# Altium PCB Печатная плата преобразователя.PcbDoc
Units mm, origin at the board's own origin, x right, y up, seen from the top; angles counter-clockwise.
Board outline 25.02 x 20 mm, 2 copper layers (Top Layer, Bottom Layer); 18 components, 12 nets, 40 pads, 4 vias.
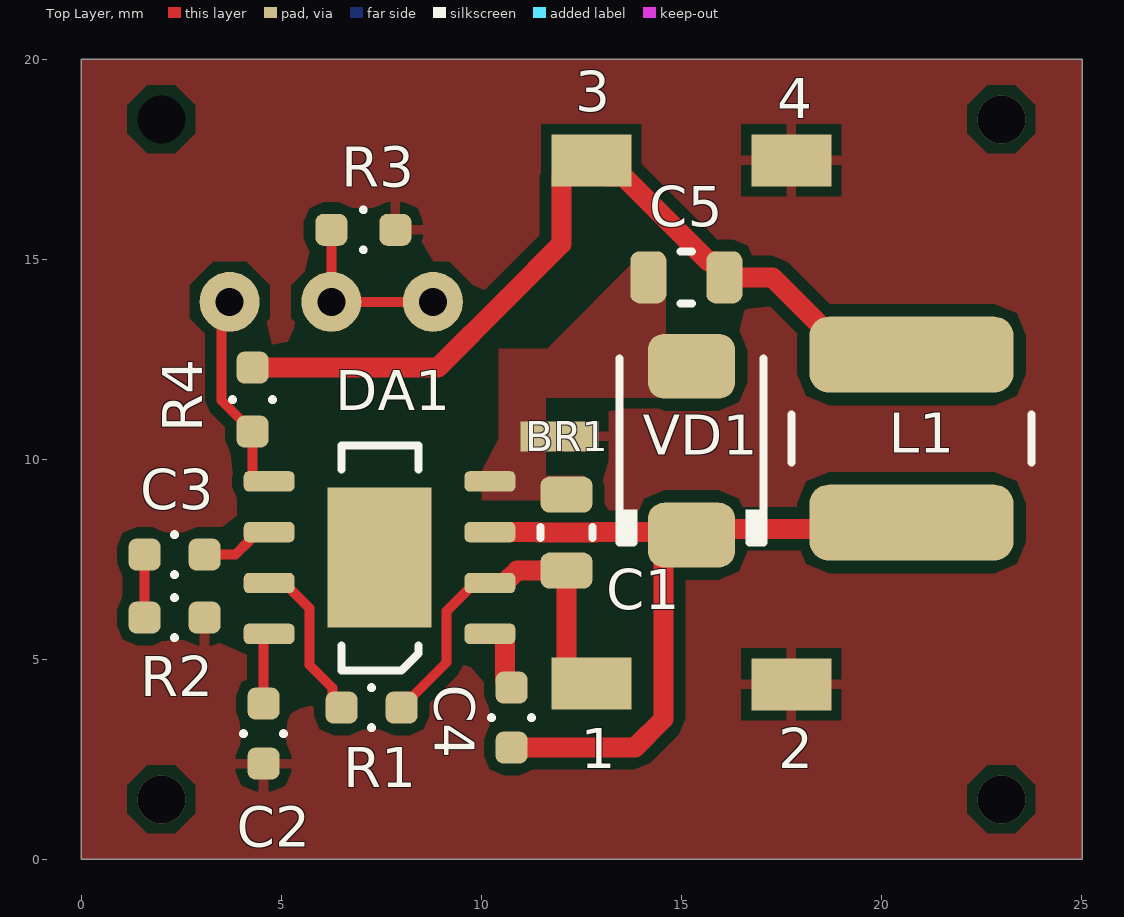
[diagram p0: Top Layer view]
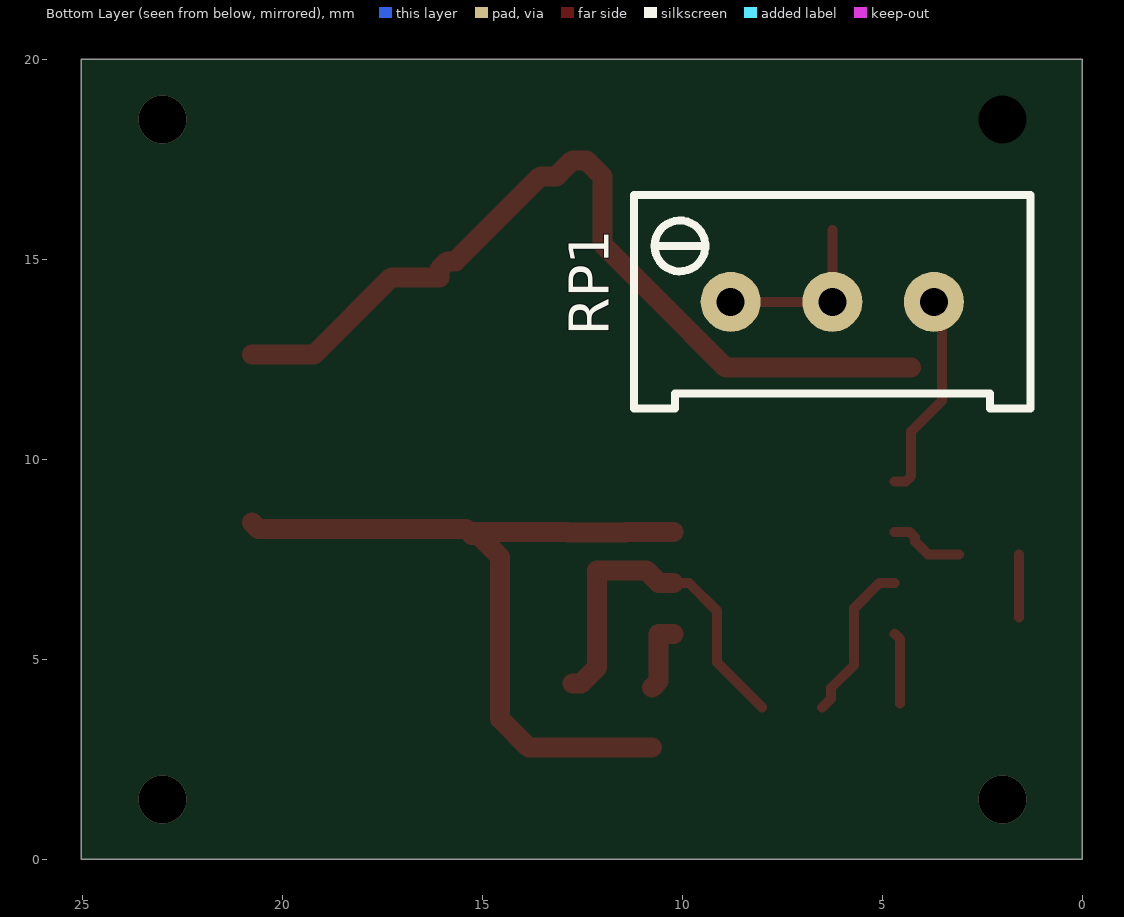
[diagram p1: Bottom Layer view, seen from below]

## Layer stack, top to bottom
Top Solder: solder mask 0.0102, Solder Resist, Dk 3.5
Top Layer: signal copper 0.0356
Dielectric 1: dielectric 0.32, FR-4, Dk 4.8
Bottom Layer: signal copper 0.0356
Bottom Solder: solder mask 0.0102, Solder Resist, Dk 3.5

## Board outline
0,0 25.025,0 25.025,20 0,20

## Design rules (kind name [scope] priority, off if disabled: settings)
Clearance [All] p1: gap=0.25 ignorepadtopadclearanceinfootprint=FALSE
PolygonConnect PolygonConnect_7 [All vs IsNamedPolygon('PGND_L01_P005')] p1: connectstyle=Direct reliefconductorwidth=0.254 reliefentries=4 polygonreliefangle="90 Angle" airgapwidth=0.254
PolygonConnect PolygonConnect_6 [All vs IsNamedPolygon('PGND_L01_P004')] p2: connectstyle=Direct reliefconductorwidth=0.254 reliefentries=4 polygonreliefangle="90 Angle" airgapwidth=0.254
PolygonConnect PolygonConnect_5 [All vs IsNamedPolygon('PGND_L01_P003')] p3: connectstyle=Direct reliefconductorwidth=0.254 reliefentries=4 polygonreliefangle="90 Angle" airgapwidth=0.254
PolygonConnect PolygonConnect_4 [All vs IsNamedPolygon('tga')] p4: connectstyle=Direct reliefconductorwidth=0.254 reliefentries=4 polygonreliefangle="90 Angle" airgapwidth=0.254
PolygonConnect PolygonConnect_3 [All vs IsNamedPolygon('tga')] p5: thpad.connectstyle=Direct thpad.reliefconductorwidth=0.254 thpad.reliefentries=4 thpad.polygonreliefangle="90 Angle" thpad.airgapwidth=0.254 smdpad.connectstyle=Direct smdpad.reliefconductorwidth=0.254 smdpad.reliefentries=4 smdpad.polygonreliefangle="90 Angle" smdpad.airgapwidth=0.254 via.connectstyle=Relief via.reliefconductorwidth=0.254 via.reliefentries=4 via.polygonreliefangle="90 Angle" via.airgapwidth=0.254
PolygonConnect PolygonConnect_2 [All vs IsNamedPolygon('tga')] p6: thpad.connectstyle=Direct thpad.reliefconductorwidth=0.254 thpad.reliefentries=4 thpad.polygonreliefangle="90 Angle" thpad.airgapwidth=0.254 smdpad.connectstyle=Relief smdpad.reliefconductorwidth=0.254 smdpad.reliefentries=4 smdpad.polygonreliefangle="90 Angle" smdpad.airgapwidth=0.254 via.connectstyle=Relief via.reliefconductorwidth=0.254 via.reliefentries=4 via.polygonreliefangle="90 Angle" via.airgapwidth=0.254
PolygonConnect PolygonConnect_1 [All vs IsNamedPolygon('NONET_L01_P001')] p7: thpad.connectstyle=Direct thpad.reliefconductorwidth=0.254 thpad.reliefentries=4 thpad.polygonreliefangle="90 Angle" thpad.airgapwidth=0.254 smdpad.connectstyle=Direct smdpad.reliefconductorwidth=0.254 smdpad.reliefentries=4 smdpad.polygonreliefangle="90 Angle" smdpad.airgapwidth=0.254 via.connectstyle=Relief via.reliefconductorwidth=0.254 via.reliefentries=4 via.polygonreliefangle="90 Angle" via.airgapwidth=0.254
PolygonConnect [All] p8: connectstyle=Relief reliefconductorwidth=0.254 reliefentries=4 polygonreliefangle="90 Angle" airgapwidth=0.254
RoutingVias [All] p1: holewidth=1 width=1 viastyle="Through Hole" minholewidth=0.5 minwidth=1 maxholewidth=2 maxwidth=3
SolderMaskExpansion [All] p1: expansion=0.102 istentingtop=FALSE
Width [All] p1: maxlimit=0.5 minlimit=0.25 preferedwidth=0.25
30 further rules are at their usual default settings.

## Classes and differential pairs
component class "Схема преобразователя": 1 2 3 4 BR1 C1 C2 C3 C4 C5 L1 R1 R2 R3 R4 RP1 VD1

## Components (designator, comment, footprint, x,y, rotation, side; value= is the part's Value field where it differs from the comment)
1 "Контактная площадка" Cont_point#1 12.75,4.4 r90 top
2 "Контактная площадка" Cont_point#2 17.75,4.375 r90 top
3 "Контактная площадка" Cont_point#3 11.855,17.475 r90 top
4 "Контактная площадка" Cont_point#4 17.05,17.475 r90 top
BR1 "Соединение цепей" BREAK_GND 13.425,10.575 r180 top net-tie
C1 "CC0805MKX5R5BB476 (Yageo) SMD 0805-22мкФ±20% 25В X5R. -55°C ~ 85°C" C0805 12.13,8.168 r90 top value=22мк
C2 "CGA3E2X7R1H104K080AA (TDK Corporation) SMD 0603-0,1мкФ±10% 50В X7R. -55°C ~ 125°C" C0603 4.555,3.143 r270 top value=0,1мк
C3 "GCM188R71C105MA64 (Murata) SMD 0603-1мкФ±20% 16В X7R. -55°C ~ 125°C" C0603 2.33,7.618 r180 top value=330п
C4 "GRM188R71H103KA01 (Murata) SMD 0603-0,01мкФ±10% 50В X7R. -55°C ~ 125°C" C0603 10.755,3.543 r270 top value=0,01мк
C5 "CC0805MKX5R5BB476 (Yageo) SMD 0805-22мкФ±20% 25В X5R. -55°C ~ 85°C" C0805 15.125,14.55 r180 top value=22мк
DA1 "Микросхема MP2307DN-LF-Z" SO8_PowerPad 7.455,7.543 r180 top
L1 "Дроссель VLS6045EX-220M 22мкГн±20% 1,9А" VLS6045 20.755,10.518 r0 top value=22мкГн
R1 "0603-100 кОм±5% SMD -60°C ~ 155°C" R0603#1 7.255,3.793 r180 top value=100к
R2 "0603-6,81 кОм±1% SMD -60°C ~ 155°C" R0603#1 2.33,6.043 r0 top value=6,81к
R3 "0603-1,2 кОм±5% SMD -60°C ~ 155°C" R0603#2 7.05,15.738 r0 top value=1,3к
R4 "0603-24 кОм±5% SMD -60°C ~ 155°C" R0603#2 4.28,11.493 r90 top value=24к
RP1 "Резистор 3296W-1-202LF" 3296W 6.25,13.938 r0 bottom value=10к
VD1 "Диод Шоттки SK56" DO214Aa 15.255,10.218 r270 top

## Footprints (in the part's own frame and the unit in brackets; to place one, negate y for a bottom-side part, rotate by r counter-clockwise, add the part's x,y. Pads: shape width x height; smd on the part's side, far side on the other; paste and mask are expansions set on the pad)
3296W [mm] "Подстроечный многооборотный резистор Bourns 3296W"
  round 1.5 hole 0.7: 1(2.54,0) 2(0,0) 3(-2.54,0)
  silkscreen extent -4.95,-2.67 4.95,2.67, body extent -4.76,-2.42 4.76,2.41, height 11.56
BREAK_GND [mm] "Разделение типов земли или питания"
  rect 1x0.75 smd paste-1 mask-1: 1(1,0) 2(1.95,0)
C0603 [mm] "Размер 1.6 x 0.8 мм; точность установки ±0.25 мм"
  rrect50% 0.8x0.8 smd: 1(-0.75,0) 2(0.75,0)
  silkscreen extent -0.01,-0.51 0.01,0.51, body extent -0.8,-0.4 0.8,0.4, height 0.95
C0805 [mm] "Размер 2.0 x 1.3 мм; точность установки ±0.25 мм"
  rrect50% 0.9x1.3 smd: 1(-0.95,0) 2(0.95,0)
  silkscreen extent -0.14,-0.65 0.14,0.65, body extent -1,-0.65 1,0.65, height 1.45
Cont_point#1 [mm] "Контактная площадка на плате"
  rect 1.3x2 smd mask+0.102: 1(0,0)
Cont_point#2 [mm] "Контактная площадка на плате"
  rect 1.3x2 smd paste-1: 1(0,0)
Cont_point#3 [mm] "Контактная площадка на плате"
  rect 1.3x2 smd paste-1: 1(0,-0.895)
Cont_point#4 [mm] "Контактная площадка на плате"
  rect 1.3x2 smd mask+0.102: 1(0,-0.7)
DO214Aa [mm] "5.6x3.95 (SMB)"
  rrect50% 1.62x2.18 smd: 1(-2.11,0) 2(2.11,0)
  silkscreen extent -2.3,-1.8 2.3,1.8, body extent -2.73,-1.8 2.67,1.8, height 2.3
R0603#1 [mm] "Размер 1.6 x 0.8 мм; точность установки ±0.25 мм"
  rrect50% 0.8x0.8 smd: 1(-0.75,0) 2(0.75,0)
  silkscreen extent -0.01,-0.51 0.01,0.51, body extent -0.8,-0.4 0.8,0.4, height 0.5
R0603#2 [mm] "Размер 1.6 x 0.8 мм; точность установки ±0.25 мм"
  rrect50% 0.8x0.8 smd: 1(-0.8,0) 2(0.8,0)
  silkscreen extent -0.01,-0.51 0.01,0.51, body extent -0.8,-0.4 0.8,0.4, height 0.5
SO8_PowerPad [mm] "Корпус SOIC-8 с добавочным выводом под корпусом (PowerPad)"
  rrect50% 1.27x0.51 smd: 1(-2.76,1.905) 2(-2.76,0.635) 3(-2.76,-0.635) 4(-2.76,-1.905) 5(2.76,-1.905) 6(2.76,-0.635) 7(2.76,0.635) 8(2.76,1.905)
  rect 2.6x3.5 smd: 9(0,0)
  silkscreen extent -0.97,-2.8 0.95,2.83, body extent -3,-2.45 3,2.45, height 1.57
VLS6045 [mm] "6.0 x 6.0mm Max.(L x W), 4.5mm Max. Height."
  rrect50% 5.1x1.9 smd: 1(0,2.1) 2(0,-2.1)
  silkscreen extent -3,-0.6 3,0.6, body extent -3,-3 3,3, height 4.5

## Part data
1 2 3 4: library part SPS0014, "Контактная площадка на плате, 1,3х2 мм", ID=SPS0014, Примечание="Контактная площадка"
BR1: library part SPS0002, "Соединение разных типов земли или питания", ID=SPS0002, Примечание="Специальный символ"
C1 C5: library part C0079, "0805, 22мк, ±20%, 25В, X5R", Manufacturer=Yageo, ManufacturerPartNumber=CC0805MKX5R5BB476, Operating Temperature="-55°C ~ 85°C", Power/Voltage=25В, Tolerance=±20%, ComponentLink1Description="Параметры конденсатора (Yageo)", ComponentLink1URL=D:/AltiumDoc/Library/Datasheets/Yageo/CC0805MKX5R8BB226.pdf, ComponentLink2Description="Сайт производителя", ComponentLink2URL=https://www.yageo.com/, ComponentLink3Description="Страница поставщика (Платан)", ComponentLink3URL=https://www.platan.ru/cgi-bin/qwery.pl/id=2015146779, ComponentLink4Description="Описание конденсатора на сайте производителя", ComponentLink4URL=https://www.yageo.com/en/Chart/Download/pdf/CC0805MKX5R8BB226, Cost=6,08, ID=C0079, Name_for_setter="0805-22мк±20%/25В--CC0805MKX5R5BB476 *** SMD", Rem=SMD, SMD=SMD, TKE=X5R, ВП/ОТК=Импорт, Корпус=0805, Примечание=Yageo, Тип расширенный=Конденсатор, Тип элемента=Конденсатор
C2: library part C0011, "0603, 0,1мк, ±10%, 50В, X7R", Manufacturer="TDK Corporation", ManufacturerPartNumber=CGA3E2X7R1H104K080AA, Operating Temperature="-55°C ~ 125°C", Power/Voltage=50В, Tolerance=±10%, ComponentLink1Description="Каталог (TDK Corporation, автомобильное применение)", ComponentLink1URL=D:/AltiumDoc/Library/Datasheets/TDK/mlcc_automotive_general_en.pdf, ComponentLink2Description="Сайт производителя", ComponentLink2URL=http://www.tdk.com/, ComponentLink4Description="Параметры конденсатора", ComponentLink4URL=D:/AltiumDoc/Library/Datasheets/TDK/mlccspec_automotive_general_midvoltage_en.pdf, Cost=6,3, ID=C0011, Name_for_setter="0603-0,1мк±10%/50В--CGA3E2X7R1H104K080AA *** SMD", Rem=SMD, SMD=SMD, TKE=X7R, ВП/ОТК=Импорт, Корпус=0603, Примечание="TDK Corporation", Тип расширенный=Конденсатор, Тип элемента=Конденсатор
C3: library part C0041, "0603, 1мк, ±20%, 16В, X7R Automotive", Manufacturer=Murata, ManufacturerPartNumber=GCM188R71C105MA64, Operating Temperature="-55°C ~ 125°C", Power/Voltage=16В, Tolerance=±20%, ComponentLink1Description="Параметры конденсатора (Murata, Automotive)", ComponentLink1URL=D:/AltiumDoc/Library/Datasheets/Murata/GCM188R71C105KA64_.pdf, ComponentLink2Description="Сайт производителя", ComponentLink2URL=https://www.murata.com/, ComponentLink4Description="Описание конденсатора на сайте производителя (Murata)", ComponentLink4URL=https://www.murata.com/en-global/products/productdetail.aspx?partno=GCM188R71C105KA64%23, Cost=20, ID=C0041, Name_for_setter="0603-1мк±20%/16В--GCM188R71C105MA64 *** SMD", Rem=SMD, SMD=SMD, TKE=X7R, ВП/ОТК=AEC-Q200, Корпус=0603, Примечание=Murata, Тип расширенный=Конденсатор, Тип элемента=Конденсатор
C4: library part C0038, "0603, 0,01мк, ±10%, 50В, X7R", Manufacturer=Murata, ManufacturerPartNumber=GRM188R71H103KA01, Operating Temperature="-55°C ~ 125°C", Power/Voltage=50В, Tolerance=±10%, ComponentLink1Description="Параметры конденсатора (Murata)", ComponentLink1URL=D:/AltiumDoc/Library/Datasheets/Murata/GRM188R71H103KA01_.pdf, ComponentLink2Description="Сайт производителя", ComponentLink2URL=https://www.murata.com/, ComponentLink3Description="Страница поставщика (Чип и Дип)", ComponentLink3URL=https://www.chipdip.ru/product/grm188r71h103k, ComponentLink4Description="Описание конденсатора на сайте производителя (Murata)", ComponentLink4URL=https://www.murata.com/en-eu/products/productdetail?partno=GRM188R71H103KA01%23, Cost=3, ID=C0038, Name_for_setter="0603-0,01мк±10%/50В--GRM188R71H103KA01 *** SMD", Rem=SMD, SMD=SMD, TKE=X7R, ВП/ОТК=Импорт, Корпус=0603, Примечание=Murata, Тип расширенный=Конденсатор, Тип элемента=Конденсатор
DA1: library part DP0035, "DC/DC пониж. преобр., Вх(4,75-23В), вых - 3А, 340 кГц, SMD. NRFND!!!", Manufacturer=MPS, ManufacturerPartNumber=MP2307DN-LF-Z, Operating Temperature="-40°C ~ 85°C", Storage Temperature="-65°C ~ 150°C", ComponentLink1Description="Параметры DC/DC преобразователя (MPS)", ComponentLink1URL=D:/AltiumDoc/Library/Datasheets/MPS/MP2307.pdf, ComponentLink2Description="Сайт производителя", ComponentLink2URL=https://www.monolithicpower.com/en/, ComponentLink3Description="Сайт поставщика (Чип и Дип)", ComponentLink3URL=https://www.chipdip.ru/product/mp2307dn, ComponentLink4Description="Страница на сайте производителя", ComponentLink4URL=https://www.monolithicpower.com/en/mp2307.html, Cost=130, DIR=DIR, ID=DP0035, Name_for_setter="MP2307DN-LF-Z *** DIR***SMD", Rem=DC/DC, SMD=SMD, ВП/ОТК=Импорт, Корпус=SO8-PowPad, ОКП=импорт, Примечание=MPS, Тип расширенный=Микросхема, Тип элемента=Микросхема
L1: library part LL0009, "Дроссель 22мкГн, корпус - VLS6045", Manufacturer=TDK, ManufacturerPartNumber=VLS6045EX-220M, Operating Temperature="-40°C ~ 105°C", Power/Voltage=1,9А, Tolerance=±20%, ComponentLink1Description="Параметры дросселя (TDK)", ComponentLink1URL=D:/AltiumDoc/Library/Datasheets/TDK/inductor_commercial_power_vls6045ex_en.pdf, ComponentLink2Description="Сайт производителя", ComponentLink2URL=https://product.tdk.com/info/en/index.html, ComponentLink3Description="Страница поставщика (Чип и Дип)", ComponentLink3URL=https://www.chipdip.ru/product/vls6045ex-220m-22, ComponentLink4Description="Страница на сайте производиетеля", ComponentLink4URL=https://product.tdk.com/en/search/inductor/inductor/smd/info?part_no=VLS6045EX-100M&utm_source=inductor_commercial_power_vls6045ex_en.pdf&utm_medium=catalog, Cost=32, ID=LL0009, Name_for_setter="-22мкГн±20% 1,9А--VLS6045EX-220M *** SMD", Rem=Induct, SMD=SMD, ВП/ОТК=Импорт, ОКП=импорт, Примечание=TDK, Тип расширенный=Дроссель, Тип элемента=Дроссель
R1: library part R0236, "Общего применения, 5%", Manufacturer=Ресурс, ManufacturerPartNumber="Р1-12-0,1-100 кОм±5%", Operating Temperature="-60°C ~ 155°C", Power/Voltage=0,1Вт, Tolerance=±5%, ComponentLink1Description="Параметры резисторов серии Р1-12 ОТК (0.1Вт, АО \"Ресурс\")", ComponentLink1URL=D:/AltiumDoc/Library/Datasheets/Resurs/R1_12-SHKAB.434110.024TU.pdf, ComponentLink2Description="Сайт производителя", ComponentLink2URL=https://aoresurs.com/, ComponentLink4Description="Протокол цены", ComponentLink4URL="D:/AltiumDoc/Library/Datasheets/Resurs/preiskurant_Р1-12 ШКАБ.434110.024 ТУ.PDF", ComponentLink5Description="Страница на сайте производителя", ComponentLink5URL=https://aoresurs.com/catalog/chip_rezistory/rezistory-r1-12-priemka-otk/, Cost=3,4, ID=R0236, Name_for_setter="0603-100к±5%/0,1Вт--Р1-12-0,1-100 кОм±5% *** SMD", Rem=SMD, SMD=SMD, TKE=±100, ВП/ОТК=ОТК, Корпус=0603, ОКП=601000, Тип расширенный=Резистор, Тип элемента=Резистор, ТУ="ШКАБ.434110.024 ТУ"
R2: library part R0094, "Общего применения, 1%", Manufacturer=ЭРКОН, ManufacturerPartNumber="Р1-8В-0,1-6,81 кОм±1%-Т-А-М", Operating Temperature="-60°C ~ 155°C", Power/Voltage=0,1Вт, Tolerance=±1%, ComponentLink1Description="Параметры резисторов серии Р1-8В (0.1Вт, Эркон)", ComponentLink1URL=D:/AltiumDoc/Library/Datasheets/Erkon/Resistors/r1_8v.pdf, ComponentLink2Description="Сайт производителя", ComponentLink2URL=http://www.erkon-nn.ru/, ComponentLink4Description="Протокол цены", ComponentLink4URL=D:/AltiumDoc/Library/Datasheets/Erkon/Resistors/Protokol_tsen_R1-8V.pdf, Cost=9,24, ID=R0094, Name_for_setter="0603-6,81к±1%/0,1Вт--Р1-8В-0,1-6,81 кОм±1%-Т-А-М *** SMD", Rem=SMD, SMD=SMD, TKE=±250, ВП/ОТК=ВП, Корпус=0603, ОКП=601000, Тип расширенный=Резистор, Тип элемента=Резистор, ТУ="ОЖ0.467.164 ТУ"
R3: library part R0215, "Общего применения, 5%", Manufacturer=Ресурс, ManufacturerPartNumber="Р1-12-0,1-1,2 кОм±5%", Operating Temperature="-60°C ~ 155°C", Power/Voltage=0,1Вт, Tolerance=±5%, ComponentLink1Description="Параметры резисторов серии Р1-12 ОТК (0.1Вт, АО \"Ресурс\")", ComponentLink1URL=D:/AltiumDoc/Library/Datasheets/Resurs/R1_12-SHKAB.434110.024TU.pdf, ComponentLink2Description="Сайт производителя", ComponentLink2URL=https://aoresurs.com/, ComponentLink4Description="Протокол цены", ComponentLink4URL="D:/AltiumDoc/Library/Datasheets/Resurs/preiskurant_Р1-12 ШКАБ.434110.024 ТУ.PDF", ComponentLink5Description="Страница на сайте производителя", ComponentLink5URL=https://aoresurs.com/catalog/chip_rezistory/rezistory-r1-12-priemka-otk/, Cost=3,4, ID=R0215, Name_for_setter="0603-1,2к±5%/0,1Вт--Р1-12-0,1-1,2 кОм±5% *** SMD", Rem=SMD, SMD=SMD, TKE=±100, ВП/ОТК=ОТК, Корпус=0603, ОКП=601000, Тип расширенный=Резистор, Тип элемента=Резистор, ТУ="ШКАБ.434110.024 ТУ"
R4: library part R0091, "Общего применения, 5%", Manufacturer=ЭРКОН, ManufacturerPartNumber="Р1-8В-0,1-24 кОм±5%-Т-А-М", Operating Temperature="-60°C ~ 155°C", Power/Voltage=0,1Вт, Tolerance=±5%, ComponentLink1Description="Параметры резисторов серии Р1-8В (0.1Вт, Эркон)", ComponentLink1URL=D:/AltiumDoc/Library/Datasheets/Erkon/Resistors/r1_8v.pdf, ComponentLink2Description="Сайт производителя", ComponentLink2URL=http://www.erkon-nn.ru/, ComponentLink4Description="Протокол цены", ComponentLink4URL=D:/AltiumDoc/Library/Datasheets/Erkon/Resistors/Protokol_tsen_R1-8V.pdf, Cost=9,24, ID=R0091, Name_for_setter="0603-24к±5%/0,1Вт--Р1-8В-0,1-24 кОм±5%-Т-А-М *** SMD", Rem=SMD, SMD=SMD, TKE=±250, ВП/ОТК=ВП, Корпус=0603, ОКП=601000, Тип расширенный=Резистор, Тип элемента=Резистор, ТУ="ОЖ0.467.164 ТУ"
RP1: library part RA0003, "Резистор подстроечный многооборотный 10к 0.5Вт Bourns", Manufacturer=Bourns, ManufacturerPartNumber=3296W-1-202LF, Operating Temperature="-65°C ~ 150°C", Power/Voltage=0.5Вт, Tolerance=±20%, ComponentLink1Description="Описание многооборотного резистора (Bourns)", ComponentLink1URL=D:/AltiumDoc/Library/Datasheets/Bourns/Resistors_3296-series.pdf, ComponentLink2Description="Сайт производителя", ComponentLink2URL=https://www.bourns.com/, ComponentLink3Description="Страница поставщика (Чип и Дип)", ComponentLink3URL=https://www.chipdip.ru/product/3296w-1-202, Cost=60, DIR=DIR, ID=RA0003, Name_for_setter="3296W-1-202LF *** DIR", Rem=ADJ, ВП/ОТК=Импорт, Корпус=3296W, Примечание=Bourns, Тип расширенный="Резистор подстроечный многооборотный", Тип элемента=Резистор
VD1: library part VD0025, "Диод Шоттки SK56 (SMD, 60В / 5А)", Manufacturer="Diotec Semiconductor", ManufacturerPartNumber=SK56, Operating Temperature="-50°C ~ 150°C", ComponentLink1Description="Параметры диода Шоттки (Diotec Semiconductor)", ComponentLink1URL=D:/AltiumDoc/Library/Datasheets/Diotec_Semiconductor/sk52_SK515.pdf, ComponentLink2Description="Сайт производителя", ComponentLink2URL=https://diotec.com/, ComponentLink3Description="Страница поставщика (Чип и Дип)", ComponentLink3URL=https://www.chipdip.ru/product/sk56, Cost=10, DIR=DIR, ID=VD0025, Name_for_setter="SK56 *** DIR *** SMD", Rem="Shottky Diode", SMD=SMD, Storage Temperature="-50°C ~ 150°C", ВП/ОТК=Импорт, Корпус=DO-214AA, ОКП=импорт, Примечание="Diotec Semiconductor", Тип расширенный="Диод Шоттки", Тип элемента=Диод

## Via types
v1: diameter 1.2, hole 1.2, Top Layer to Bottom Layer, 3 vias
v2: diameter 0/0 (per signal layer), hole 1.2, Top Layer to Bottom Layer, 1 vias

## Nets (pads, with @x,y where several pads share a name; then routed paths per layer and width w, separated by ;. In a path a pad name is that pad's centre, name@x,y a point inside that pad or via, vN(x,y) a via of type N, cw(c..) or ccw(c..) an arc to the next point about the centre after c; other vN are vias at no path point)
GND: 2.1 4.1 BR1.1 C2.2 R2.2 R3.2
Net1_1: 1.1 C1.1 DA1.2 R1.1 | length 9.5
  Top Layer w0.25: R1.1 9.13,4.918 9.13,6.203 9.835,6.908 DA1.2
  Top Layer w0.5: DA1.2 10.595,6.908 10.6,6.913 10.6,6.925 10.893,7.218 C1.1 12.13,4.8 12.53,4.4 1.1
Net3_1: 3.1 C5.1 L1.1 R4.2 | length 21.7
  Top Layer w0.5: R4.2 8.912,12.293 10.654,14.034 12,15.381 12,17.075 12.4,17.475 3.1 13.15,17.075 13.55,17.075 15.675,14.95 15.875,14.95 16.075,14.75 C5.1 17.275,14.55 19.207,12.618 L1.1
NetC2_1: C2.1 DA1.8 | length 1.8
  Top Layer w0.25: C2.1 4.555,5.508 4.685,5.638 DA1.8
NetC3_1: C3.1 DA1.6 | length 1.9
  Top Layer w0.25: C3.1 3.855,7.618 4.186,7.95 4.186,8.048 4.316,8.178 DA1.6
NetC3_2: C3.2 R2.1 | length 1.6
  Top Layer w0.25: R2.1 C3.2
NetC4_1: C4.1 DA1.1 | length 1.8
  Top Layer w0.5: DA1.1 10.59,5.638 10.595,5.633 10.595,4.453 C4.1
NetC4_2: C4.2 DA1.3 L1.2 VD1.2 | length 19.6
  Top Layer w0.5: DA1.3 11.394,8.178 11.404,8.168 12.855,8.168 12.865,8.178 15.185,8.178 VD1.2 15.41,8.263 20.6,8.263 L1.2 ; C4.2 13.837,2.793 14.555,3.511 14.555,7.56 VD1.2@15.103,8.108
NetDA1_5: DA1.5 R4.1 RP1.3 | length 5.2
  Top Layer w0.25: RP1.3 3.505,13.733 3.505,11.468 R4.1 4.28,9.578 4.41,9.448 DA1.5
NetDA1_7: DA1.7 R1.2 | length 4.1
  Top Layer w0.25: DA1.7 5.075,6.908 5.705,6.278 5.705,4.857 6.28,4.282 6.28,4.017 R1.2
NetR3_1: R3.1 RP1.1 RP1.2 | length 4.3
  Top Layer w0.25: R3.1 RP1.2 RP1.1
PGND: BR1.2 C1.2 C5.2 DA1.4 VD1.1
pads on no net: DA1.9
copper on no net:
  other v1: 2,1.5 23,1.5 23,18.5
  other v2: 2,18.5

## Polygon pours and split planes (outlines as drawn)
GND on Top Layer "tgsa" (solid, remove dead copper, pour order 6): 0,0 0,20 25.025,20 25.025,0
PGND on Top Layer "PGND_L01_P005" (solid, pour order 5): 12.556,9.592 11.616,9.592 11.616,11.543 15.558,11.543 15.558,12.968 14.614,12.968 14.615,15.06 14.55,15.125 14.45,15.2 14.173,15.125 13.964,15.086 11.646,12.767 10.441,12.767 10.441,10.516 10.006,9.708 10.006,9.282 10.006,8.975 12.744,8.975